# EAGLE board Uno StandAlone 16MUX (EAGLE 5.11)
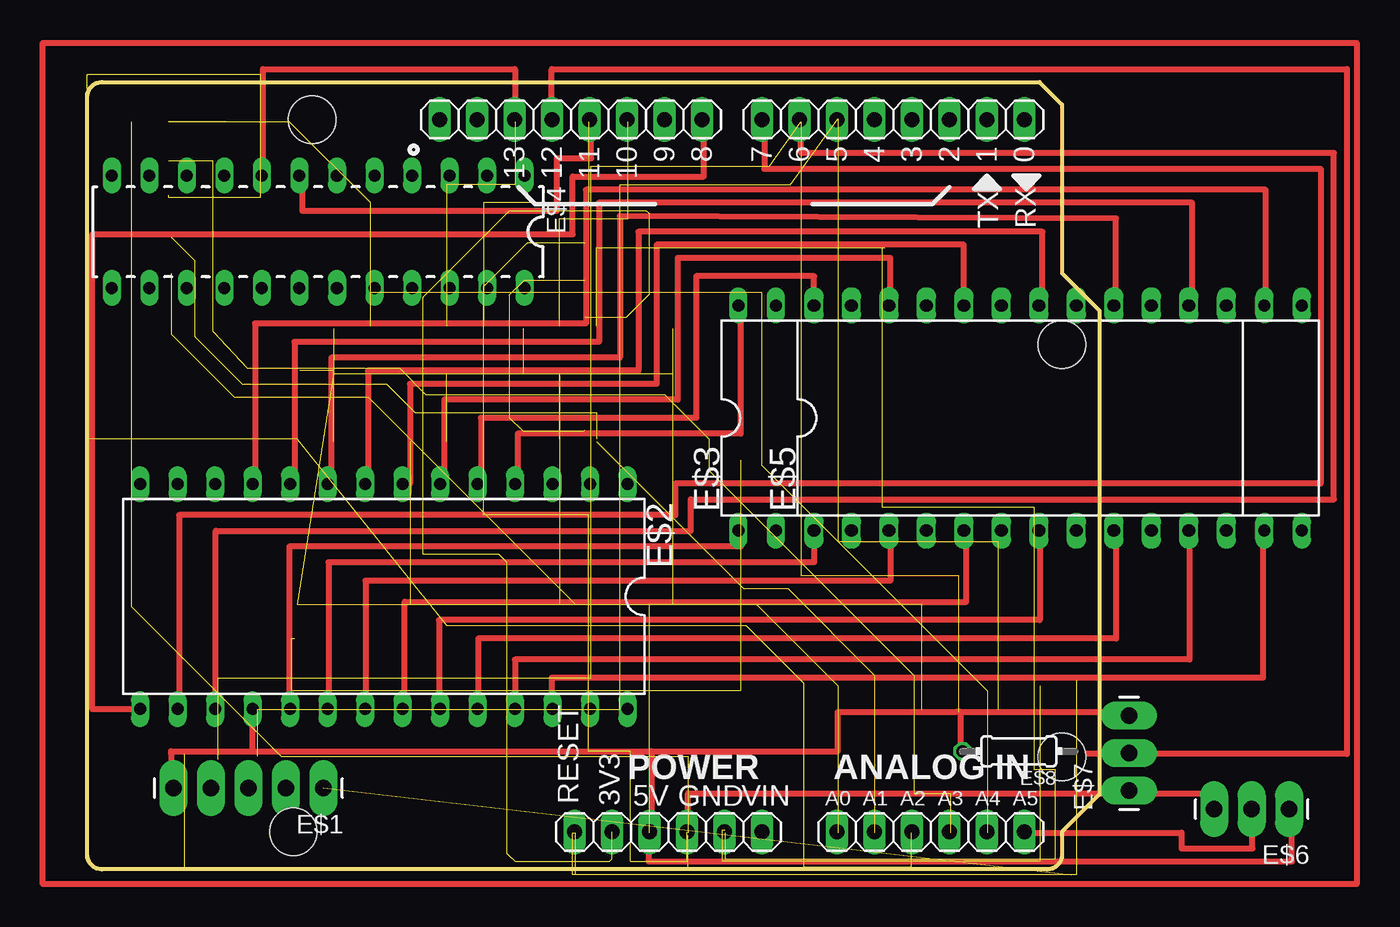
[diagram p0: board, top side]
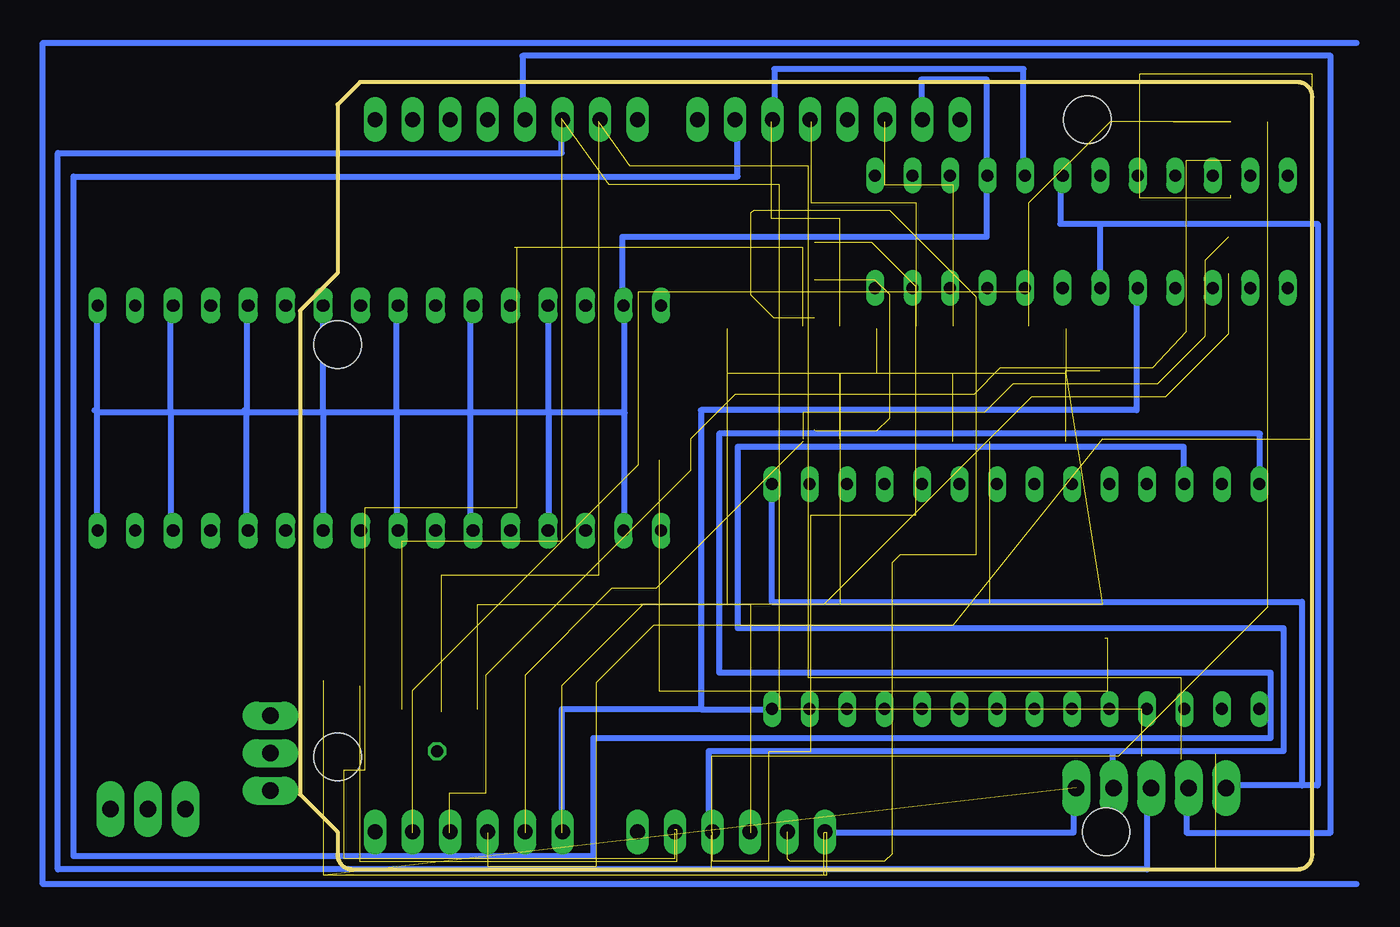
[diagram p1: board, bottom side, seen from below]

Size 68.58 x 53.34 mm. Coordinates in mm from the lower left corner, seen from the top.
Outline: 64.52,53.34 66.04,51.82 66.04,40.39 68.58,37.85 68.58,5.08 66.04,2.54 66.04,1 arc-90 65.04,0 1,0 arc-90 0,1 0,52.34 arc-90 1,53.34 64.52,53.34
Copper layers (1*16): Top 0.035mm / dielectric 1.5mm / Bottom 0.035mm
Design rules "ArduinoDEF": minimum track width 6mil, minimum drill 12mil, track to track 6mil, track to pad 6mil, pad to pad 6mil, via to via 6mil, smd to smd 6mil, copper to edge 20mil, drill to drill 6mil, minimum pad ring 8mil, minimum via ring 8mil, stop-mask expansion 0mil, vias tented up to drill 0mil, thermal gap 10mil
Net classes: 0 default: width 0.254 mm, clearance 0.254 mm; 1 power: width 0.61 mm, drill 0.61 mm, clearance 0.254 mm; 2 gnd: width 0.305 mm, drill 0.559 mm, clearance 0.254 mm; 3 usbvcc: width 0.508 mm, drill 0.61 mm, clearance 0.254 mm; 4 aref: width 0.406 mm, drill 0.61 mm, clearance 0.254 mm
Holes 3.2 mm at 66.04,35.56 66.04,7.62 15.24,50.8 13.97,2.54
vRestrict: area 22.9,44.1 to 24.6,49.1; area 25.4,45.5 to 27.1,49.1; area 28.4,45.3 to 29.6,48.8; area 31,45.3 to 32.1,48.8; area 33.5,45.3 to 34.7,48.8; area 36.1,45.3 to 37.2,48.8; area 38.7,47.2 to 39.9,48.8; area 40.3,45.1 to 47.6,46.9; area 60.3,44.2 to 61.7,46.7; area 62.9,44.2 to 64.3,46.7; area 61.3,35.8 to 64.8,37.2; area 0.6,21.8 to 2,30.1; area 5.7,22.6 to 7.4,30.1; area 47.9,10.3 to 48.5,10.8; area 50.4,10.2 to 50.9,11; area 11.3,28.8 to 12.7,31.1; area 44.8,47.5 to 46.1,48.9; area 47.6,47.4 to 48.8,48.9; area 50.2,47.4 to 51.3,48.9; area 52.8,47.4 to 54,48.9; area 55.2,47.4 to 56.4,48.9; area 57.9,47.4 to 59.1,48.9; area 60.5,47.4 to 61.6,48.9; area 63,47.4 to 64.1,48.9; area 41.3,47.2 to 42.4,48.8; area 0.3,12.4 to 9.4,24.5

## Footprints (pad centres in the part's own frame; a part is rotated, then mirrored left to right if it is on the bottom)
1X06 = drill 1.016 long: 1 -6.35,0; 2 -3.81,0; 3 -1.27,0; 4 1.27,0; 5 3.81,0; 6 6.35,0
1X05_LONGPADS = drill 1.118 pad 1.88 long: 1 0,0; 2 2.54,0; 3 5.08,0; 4 7.62,0; 5 10.16,0
DIL28-6 = drill 0.813 long: 1 -16.51,-7.62; 2 -13.97,-7.62; 3 -11.43,-7.62; 4 -8.89,-7.62; 5 -6.35,-7.62; 6 -3.81,-7.62; 7 -1.27,-7.62; 8 1.27,-7.62; 9 3.81,-7.62; 10 6.35,-7.62; 11 8.89,-7.62; 12 11.43,-7.62; 13 13.97,-7.62; 14 16.51,-7.62; 15 16.51,7.62; 16 13.97,7.62; 17 11.43,7.62; 18 8.89,7.62; 19 6.35,7.62; 20 3.81,7.62; 21 1.27,7.62; 22 -1.27,7.62; 23 -3.81,7.62; 24 -6.35,7.62; 25 -8.89,7.62; 26 -11.43,7.62; 27 -13.97,7.62; 28 -16.51,7.62
DIL24 = drill 0.813 long: 1 -13.97,-3.81; 2 -11.43,-3.81; 3 -8.89,-3.81; 4 -6.35,-3.81; 5 -3.81,-3.81; 6 -1.27,-3.81; 7 1.27,-3.81; 8 3.81,-3.81; 9 6.35,-3.81; 10 8.89,-3.81; 11 11.43,-3.81; 12 13.97,-3.81; 13 13.97,3.81; 14 11.43,3.81; 15 8.89,3.81; 16 6.35,3.81; 17 3.81,3.81; 18 1.27,3.81; 19 -1.27,3.81; 20 -3.81,3.81; 21 -6.35,3.81; 22 -8.89,3.81; 23 -11.43,3.81; 24 -13.97,3.81
1X03_LONGPADS = drill 1.118 pad 1.88 long: 1 0,0; 2 2.54,0; 3 5.08,0
0204/7 = drill 0.813 octagon: 1 -3.81,0; 2 3.81,0
1X08 = drill 1.016 long: 1 -8.89,0; 2 -6.35,0; 3 -3.81,0; 4 -1.27,0; 5 1.27,0; 6 3.81,0; 7 6.35,0; 8 8.89,0

## Placement (x,y rotation side)
AD  [1X06]  57.15,2.54 0 top
E$1  [1X05_LONGPADS]  16,5.51 180 top
E$2  [DIL28-6]  20.09,18.49 180 top
E$3  [DIL28-6]  60.63,30.58 0 top
E$4  [DIL24]  15.65,43.21 180 top
E$5  [DIL28-6]  65.79,30.58 0 top
E$6  [1X03_LONGPADS]  81.43,4.09 180 top  (outside the outline)
E$7  [1X03_LONGPADS]  70.59,5.33 90 top
E$8  [0204/7]  63.12,8 180 top
IOH  [1X08]  32.77,50.8 180 top
IOL  [1X08]  54.61,50.8 180 top
POWER  [1X06]  39.37,2.54 0 top

## Library data of the parts
AD IOH IOL POWER = pinhead
E$1 E$4 E$6 E$7 = SparkFun
E$2 E$3 E$5 = 40xx
E$8 = rcl

## Nets
N$6: POWER.4
N$7: POWER.2
N$8: IOL.1
N$9: IOL.2
N$10: POWER.5
N$11: AD.1
N$13: AD.2
N$14: AD.3
N$16: AD.4
N$17: AD.5
S$6: E$1.1

## Tracks (layer width: path | path; a pad name or v marks a point on that pad's centre or on a via)
N$1  (6 unrouted)
N$6  (9 unrouted)
N$7  (14 unrouted)
S$1  (8 unrouted)
S$2  (8 unrouted)
S$3  (3 unrouted)
S$4  (4 unrouted)
S$5  (4 unrouted)
S$6  (3 unrouted)
S$7  (1 unrouted)
S$8  (21 unrouted)
S$9  (3 unrouted)
S$10  (3 unrouted)
S$11  (3 unrouted)
S$12  (7 unrouted)
S$13  (9 unrouted)
S$14  (4 unrouted)
S$15  (7 unrouted)
S$16  (12 unrouted)
S$17  (5 unrouted)
S$18  (8 unrouted)
S$19  (1 unrouted)
S$20  (4 unrouted)
S$21  (2 unrouted)
S$22  (1 unrouted)
S$23  (2 unrouted)
S$24
  Bottom 0.406: 46.58,30.94 46.58,38.05 | 51.74,30.94 57.07,30.94 | 57.07,30.94 62.05,30.94 | 62.05,30.94 67.03,30.94 | 67.03,30.94 77.34,30.94 | 51.74,30.94 51.74,38.23 | 46.58,30.94 51.74,30.94 | 62.05,30.94 62.05,38.05 | 67.03,30.94 67.03,38.23 | 77.34,30.94 77.34,38.05 | 82.32,38.05 82.32,30.94 77.34,30.94 | 77.34,30.94 77.34,22.94 | 67.03,30.94 67.03,22.76 67.21,22.76 | 62.05,30.94 62.05,22.94 | 57.07,30.94 57.07,22.76 | 51.74,30.94 51.74,22.94 | 46.58,22.94 46.58,30.94
S$25  (1 unrouted)
S$26  (13 unrouted)
S$27  (1 unrouted)
S$28  (5 unrouted)
S$29
  Bottom 0.406: 57.07,38.23 57.07,31.11
S$30
  Bottom 0.406: 72.19,37.87 72.19,31.11 | 72.19,22.94 72.19,31.11 | 72.19,31.11 72.36,31.11
S$31
  Bottom 0.406: 82.32,22.94 82.32,31.11 82.5,31.11
S$32
  Bottom 0.406: 19.56,46.94 19.56,54.23 36.45,54.23 36.45,50.67 36.63,50.67
S$33  (4 unrouted)
S$34
  Top 0.406: 44.27,37.87 44.27,29.52 29.16,29.52 29.16,26.14
S$35
  Top 0.406: 49.25,38.23 49.25,40.18 41.25,40.18 41.25,30.58 26.67,30.58 26.67,25.96
S$36
  Top 0.406: 54.41,38.23 54.41,41.43 40.01,41.43 40.01,31.83 24.18,31.83 24.18,26.14
S$37
  Top 0.406: 59.38,38.05 59.38,42.32 38.58,42.32 38.58,32.89 21.87,32.89 21.87,26.14 21.51,26.14
S$38
  Top 0.406: 64.72,38.23 64.72,43.2 37.34,43.2 37.34,33.78 19.02,33.78 19.02,26.31
S$39
  Top 0.406: 69.7,38.05 69.7,44.09 36.09,44.27 36.09,34.67 16.54,34.67 16.54,26.14
S$40
  Top 0.406: 74.85,38.23 74.85,45.16 34.67,45.16 34.67,35.74 14.05,35.74 14.05,26.14 13.87,26.14
S$41
  Top 0.406: 79.83,38.23 79.83,46.05 33.78,46.05 33.78,36.98 11.38,36.98 11.38,26.14
S$42
  Top 0.406: 44.27,21.87 13.69,21.87 13.69,10.85
S$43
  Top 0.406: 49.25,23.11 49.25,20.8 16.36,20.8 16.36,10.85
S$44
  Top 0.406: 54.41,22.76 54.41,19.56 18.85,19.56 18.85,10.85
S$45
  Top 0.406: 21.51,10.85 21.51,18.14 59.56,18.14 59.56,22.94
S$46
  Top 0.406: 64.54,22.76 64.54,16.89 23.82,16.89 23.82,10.85
S$47
  Top 0.406: 69.7,23.11 69.7,15.65 26.49,15.65 26.49,10.85
S$48
  Top 0.406: 74.68,22.94 74.68,14.22 28.98,14.22 28.98,10.67
S$49
  Top 0.406: 79.65,22.94 79.65,12.98 31.47,12.98 31.47,10.85
S$50
  Bottom 0.406: 46.58,38.23 46.76,38.23 46.76,42.85 22.05,42.85 22.05,53.52 26.49,53.52 26.49,50.67
S$51
  Bottom 0.406: 8.71,26.31 8.71,28.63 38.94,28.63 38.94,16.36 1.96,16.36 1.96,8 13.51,8 | 13.51,5.69 13.51,8 | 13.51,8 13.69,8 40.89,8 40.89,2.31 40.72,2.31
S$52
  Top 0.406: 14.58,47.3 14.58,44.63 31.83,44.63 31.83,48.18 34.14,48.18 34.14,50.85
S$53
  Top 0.406: 11.91,46.94 11.91,54.23 28.98,54.23 28.98,50.67 29.34,50.67
S$54
  Bottom 0.406: 8.53,5.69 8.53,2.49 -1.25,2.49 -1.25,55.12 53.52,55.12 53.52,50.49 53.34,50.49
S$55
  Bottom 0.406: 11.2,6.04 11.2,0 84.99,0 84.99,48.54 50.85,48.54 50.85,50.85
S$56
  Bottom 0.406: 3.56,26.14 3.56,29.52 40.18,29.52 40.18,13.34 2.85,13.34 2.85,8.89 48.72,8.89 48.72,0.89 83.92,0.89 83.92,46.94 38.94,46.94 38.94,51.03 39.29,51.03
S$57
  Bottom 0.406: 16.18,5.51 16.18,2.49 33.07,2.49
S$58
  Bottom 0.406: 11.91,39.29 11.91,31.11 41.43,31.11 41.43,10.85 | 41.43,10.85 36.63,10.85 | 41.43,10.85 50.85,10.85 50.85,2.67
S$59
  Bottom 0.406: 36.63,26.14 36.63,18.14 0.71,18.14 0.71,5.69 | 17.07,46.76 17.07,43.74 14.4,43.74 | 14.4,43.74 -0.36,43.74 -0.36,5.69 0.71,5.69 | 0.71,5.69 6.22,5.69 | 14.4,43.74 14.4,39.29
S$60
  Top 0.406: 5.87,5.69 5.69,8 11.2,8 | 11.2,8 38.23,8 | 38.23,8 38.23,2.49 | 11.2,8 11.2,10.85 | 38.23,8 50.85,8 50.85,10.67 58.85,10.67 59.21,10.67 | 59.21,10.67 70.41,10.67 | 59.21,7.82 59.21,10.67
S$61
  Top 0.406: 8.71,10.85 8.71,22.94 40.89,22.94 40.89,25.07 84.45,25.07 84.45,48.54 48.36,48.54 48.36,50.85
S$62
  Top 0.406: 44.27,22.94 44.09,22.94 44.09,22.05
S$63
  Top 0.406: 45.87,50.67 45.87,47.47 83.57,47.47 83.57,26.14 39.83,26.14 39.83,24 6.22,24 6.22,10.67
S$64
  Top 0.406: 3.56,10.85 0.36,10.85 0.36,43.03 32.89,43.03 32.89,46.94 41.78,46.94 41.78,50.67
S$65
  Top 0.406: 63.65,2.49 74.14,2.49 74.14,1.42 78.94,1.42 78.94,4.09
S$66
  Top 0.406: 38.05,2.49 38.05,0.53 81.61,0.53 81.61,4.27
S$67
  Top 0.406: 40.72,2.67 40.72,5.16 76.28,5.16 76.28,3.91
S$68
  Top 0.406: 31.47,50.85 31.47,54.23 85.34,54.23 85.34,7.82 67.03,7.82 67.03,8
S$70
  Top 0.406: 86,-1 -3,-1 -3,56 86,56 86,-1
S$71
  Bottom 0.406: -3,-1 86,-1 86,56 -3,56

## Text on the board
tPlace: 13 | 12 | 11 | 10 | 9 | 8 | 7 | 6 | 5 | 4 | 3 | 2 | 1 | 0
tNames: TX | RX | ANALOG IN | RESET | 3V3 | 5V | GND | VIN | A0 | A1 | A2 | A3 | A4 | A5
ReferenceLC: L | TX | RX | PC1 | PC2
214bmp: D:/SmartProjects/Snc/a4_bn_logo2.bmp